# Altium PCB SL1 Xilinx Spartan-IIE PQ208 Rev1.01.PcbDoc
Units mm, origin at the board's own origin, x right, y up, seen from the top; angles counter-clockwise.
Board outline 180.01 x 51.01 mm, 2 copper layers (Top Layer, Bottom Layer); 121 components, 128 nets, 653 pads, 0 vias.
Unrouted connection lines stored in the file: 403.
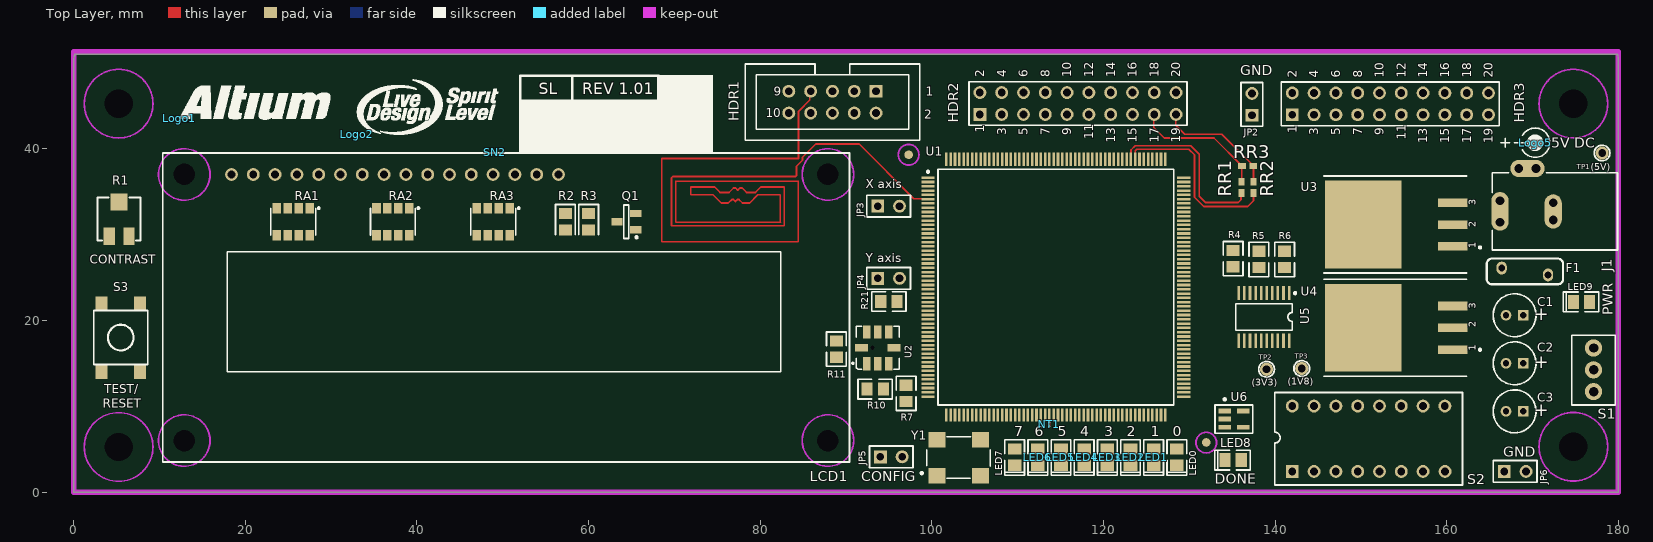
[diagram p0: Top Layer view]
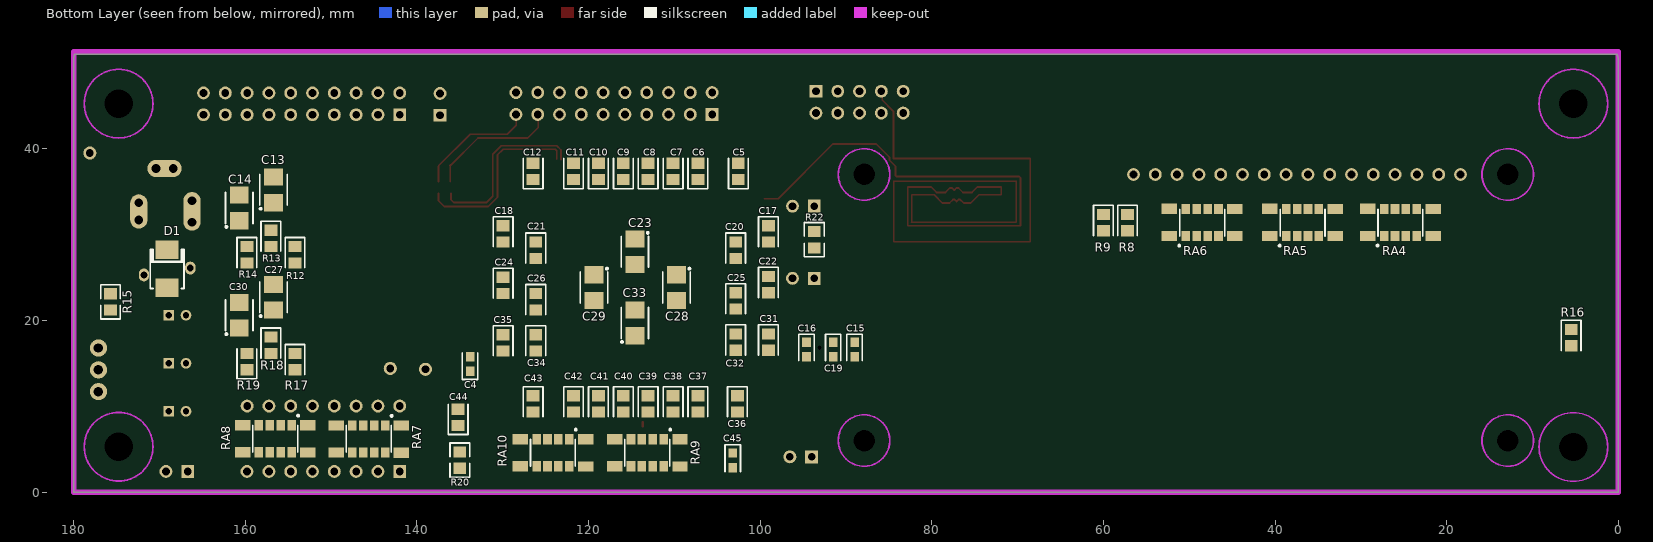
[diagram p1: Bottom Layer view, seen from below]

## Layer stack, top to bottom
Top Layer: signal copper 0.0356
Dielectric: dielectric 0.32, FR-4, Dk 4.8
Bottom Layer: signal copper 0.0356

## Board outline
0,-0.005 cw(c0,0) -0.005,0 -0.005,50.5 cw(c0,50.5) 0,50.505 0.15,51 89.775,51 179.925,51 180,50.505 cw(c180,50.5) 180.005,50.5 180.005,0 cw(c180,0) 180,-0.005

## Design rules (kind name [scope] priority, off if disabled: settings)
Clearance "Clearance_Power Polygon" [inpolygon and innetclass('Power')] p1: gap=0.3
Clearance [All] p2: gap=0.2 // General
ComponentClearance ComponentClearance_D1_F1 [InComponent('D1') vs InComponent('F1')] p1: gap=0.03 collisioncheckmode=3 verticalgap=0.254 showdistances=FALSE
ComponentClearance ComponentClearance_JP4_R21 [InComponent('JP4') vs InComponent('R21')] p2: gap=0.07 collisioncheckmode=3 verticalgap=0.254 showdistances=FALSE
ComponentClearance ComponentClearance_LCD1_U2 [InComponent('LCD1') vs InComponent('U2')] p3: gap=0.09 collisioncheckmode=3 verticalgap=0.254 showdistances=FALSE
ComponentClearance ComponentClearance_U1_U6 [InComponent('U1') vs InComponent('U6')] p4: gap=0.1 collisioncheckmode=3 verticalgap=0.254 showdistances=FALSE
ComponentClearance ComponentClearance_S2 [InComponent('S2') vs InComponent('RA7') Or InComponent('RA8')] p5: gap=0.1 collisioncheckmode=3 verticalgap=0.254 showdistances=FALSE // Why is such a small clearance necessary?
ComponentClearance ComponentClearance_LCD1_R11 [InComponent('LCD1') vs InComponent('R11')] p6: gap=0.16 collisioncheckmode=3 verticalgap=0.254 showdistances=FALSE
ComponentClearance ComponentClearance_J1_Logo5 [InComponent('J1') vs InComponent('Logo5')] p7: gap=0.19 collisioncheckmode=3 verticalgap=0.254 showdistances=FALSE
ComponentClearance ComponentClearance_R2_R3 [InComponent('R2') vs InComponent('R3')] p8: gap=0.19 collisioncheckmode=3 verticalgap=0.254 showdistances=FALSE
ComponentClearance ComponentClearance_R5 [InComponent('R5') vs InComponent('R4') Or InComponent('R6')] p9: gap=0.19 collisioncheckmode=3 verticalgap=0.254 showdistances=FALSE
ComponentClearance ComponentClearance_LEDs [HasFootprint('SMD _LED') vs HasFootprint('SMD _LED')] p10: gap=0.19 collisioncheckmode=3 verticalgap=0.254 showdistances=FALSE
ComponentClearance ComponentClearance_R7_R10 [InComponent('R7') vs InComponent('R10')] p11: gap=0.24 collisioncheckmode=3 verticalgap=0.254 showdistances=FALSE
ComponentClearance ComponentClearance_U1 [InComponent('U1') vs Not InComponent('NT1') && Not InComponent('LED8')] p12: gap=0.254 collisioncheckmode=3 verticalgap=0.254 showdistances=FALSE
ComponentClearance ComponentClearance_General [Not InComponent('U1') vs Not InComponent('U1')] p13: gap=0.254 collisioncheckmode=3 verticalgap=0.254 showdistances=FALSE
ComponentClearance ComponentClearance_Default [All] p14 off: gap=0.254 collisioncheckmode=3 verticalgap=0.254 showdistances=FALSE
DiffPairsRouting [All] p1: maxlimit=0.254 minlimit=0.254 mostfreqgap=0.254 maxuncoupledlength=12.7
FabricationTestPointUsage TestPointUsage [All] p1 off: valid=0 allowmultiple=FALSE
FabricationTestpoint Testpoint [All] p1 off: side=3 testpointundercomponent=TRUE minsize=1.016 maxsize=2.54 preferedsize=1.524 minholesize=0 maxholesize=1.016 preferedholesize=0.813 testpointgrid=0.025 allowsidetop=TRUE allowsidebottom=TRUE usegrid=TRUE gridtolerance=0
HoleSize [All] p1: absolutevalues=TRUE maxlimit=3.302 minlimit=0 maxpercent=80.000 minpercent=20.000
PlaneConnect [All] p1: planeconnectstyle=Relief reliefexpansion=0.3 reliefentries=4 reliefconductorwidth=0.2 reliefairgap=0.2
PolygonConnect PolygonConnect_Power [innetclass('Power')] p1: connectstyle=Relief reliefconductorwidth=0.3 reliefentries=4 polygonreliefangle="90 Angle"
PolygonConnect [All] p2: connectstyle=Relief reliefconductorwidth=0.2 reliefentries=4 polygonreliefangle="90 Angle"
RoutingVias RoutingVias_Power [innetclass('Power')] p1: holewidth=0.6 width=0.9 viastyle="Through Hole" minholewidth=0.6 minwidth=0.9 maxholewidth=0.8 maxwidth=1.5
RoutingVias [All] p2: holewidth=0.6 width=0.9 viastyle="Through Hole" minholewidth=0.6 minwidth=0.9 maxholewidth=0.6 maxwidth=0.9
SignalStimulus SignalStimulus_P [InNet('DRV_P')] p1: kind=1 level=0 starttime=10.00n stoptime=60.00n periodtime=100.00n
SignalStimulus SignalStimulus_N [InNet('DRV_N')] p2: kind=1 level=1 starttime=10.00n stoptime=60.00n periodtime=100.00n
SilkscreenOverComponentPads [All] p1: minsilkscreentomaskgap=0.254
SolderMaskExpansion SolderMaskExpansion_Power_Vias [isvia] p1: expansion=0
SolderMaskExpansion [All] p2: expansion=0.1
SupplyNets SupplyNets_VCCO [InNet('VCCO')] p1: voltage=3.300
SupplyNets SupplyNets_GND [InNet('GND')] p2: voltage=0.000
SupplyNets SupplyNets_5V [InNet('5V')] p3: voltage=5.000
SupplyNets SupplyNets_VCCINT [InNet('VCCINT')] p4: voltage=1.800
Width Width_Power [innetclass('Power') and not inpolygon] p1: maxlimit=2 minlimit=0.3 preferedwidth=0.3
Width [All] p2: maxlimit=2 minlimit=0.2 preferedwidth=0.2
21 further rules are at their usual default settings.

## Classes and differential pairs
net class Power: 5V GND VCCINT VCCO
net class LCD_DB[7..0]: LCD_DB0 LCD_DB1 LCD_DB2 LCD_DB3 LCD_DB4 LCD_DB5 LCD_DB6 LCD_DB7
net class LEDS[7..0]: LEDS0 LEDS1 LEDS2 LEDS3 LEDS4 LEDS5 LEDS6 LEDS7
net class SW[7..0]: SW0 SW1 SW2 SW3 SW4 SW5 SW6 SW7
component class SL_FPGA_Manual_2E: C1 C2 C3 C5 C6 C7 C8 C9 C10 C11 C12 C13 C14 C17 C18 C20 C21 C22 C23 C24 C25 C26 C27 C28 C29 C30 C31 C32 C33 C34 C35 C36 C37 C38 C39 C40 C41 C42 C43 D1 F1 J1 JP2 JP6 LED9 R12 R13 R14 R15 R17 R18 R19 S1 TP1 TP2 TP3 U3 U4
component class U_SL_Config: C4 C44 LED8 R4 R5 R6 R20 U5 U6
component class U_SL_FPGA_Auto_2E: U1
component class U_SL_LCD_SW_LED: LCD1 LED0 LED1 LED2 LED3 LED4 LED5 LED6 LED7 Q1 R1 R2 R3 R8 R9 R16 RA1 RA2 RA3 RA4 RA5 RA6 RA7 RA8 RA9 RA10 S2 S3
differential pair DRV: +DRV_P -DRV_N
differential pair REC: +REC_P -REC_N

## Components (designator, comment, footprint, x,y, rotation, side; value= is the part's Value field where it differs from the comment)
C1 "100uF 16V" CAPPR2-5X6.8 167.9,20.6 r180 top
C2 "100uF 16V" CAPPR2-5X6.8 167.9,15 r180 top
C3 "100uF 16V" CAPPR2-5X6.8 167.9,9.4 r180 top
C4 "10nF" CC1608-0603 133.8,14.9 r90 bottom
C5 "0.1uF" CC2012-0805 102.55,37.35 r90 bottom
C6 "0.1uF" CC2012-0805 107.25,37.35 r90 bottom
C7 "0.1uF" CC2012-0805 110.15,37.35 r90 bottom
C8 "0.1uF" CC2012-0805 113.05,37.35 r90 bottom
C9 "0.1uF" CC2012-0805 115.95,37.35 r90 bottom
C10 "0.1uF" CC2012-0805 118.85,37.35 r90 bottom
C11 "0.1uF" CC2012-0805 121.75,37.35 r90 bottom
C12 "0.1uF" CC2012-0805 126.45,37.35 r90 bottom
C13 "10uF" MCCT-B 156.7,35.2 r90 bottom
C14 "10uF" MCCT-B 160.7,33.1 r90 bottom
C15 "100nF" CC1608-0603 89,16.6 r270 bottom
C16 "100nF" CC1608-0603 94.6,16.6 r270 bottom
C17 "0.1uF" CC2012-0805 99.05,30.075 r270 bottom
C18 "0.1uF" CC2012-0805 129.95,30.075 r270 bottom
C19 "100nF" CC1608-0603 91.5,16.6 r270 bottom
C20 "0.1uF" CC2012-0805 102.85,28.175 r270 bottom
C21 "0.1uF" CC2012-0805 126.15,28.175 r270 bottom
C22 "0.1uF" CC2012-0805 99.05,24.175 r270 bottom
C23 "10uF" MCCT-B 114.6,28 r270 bottom
C24 "0.1uF" CC2012-0805 129.95,24.075 r270 bottom
C25 "0.1uF" CC2012-0805 102.85,22.275 r270 bottom
C26 "0.1uF" CC2012-0805 126.15,22.175 r270 bottom
C27 "10uF" MCCT-B 156.7,22.7 r90 bottom
C28 "10uF" MCCT-B 109.75,23.825 r270 bottom
C29 "10uF" MCCT-B 119.35,23.825 r270 bottom
C30 "10uF" MCCT-B 160.7,20.6 r90 bottom
C31 "0.1uF" CC2012-0805 99.05,17.475 r270 bottom
C32 "0.1uF" CC2012-0805 102.85,17.475 r270 bottom
C33 "10uF" MCCT-B 114.6,19.7 r90 bottom
C34 "0.1uF" CC2012-0805 126.15,17.375 r270 bottom
C35 "0.1uF" CC2012-0805 129.95,17.375 r270 bottom
C36 "0.1uF" CC2012-0805 102.65,10.275 r270 bottom
C37 "0.1uF" CC2012-0805 107.25,10.275 r270 bottom
C38 "0.1uF" CC2012-0805 110.15,10.275 r270 bottom
C39 "0.1uF" CC2012-0805 113.05,10.275 r270 bottom
C40 "0.1uF" CC2012-0805 115.95,10.275 r270 bottom
C41 "0.1uF" CC2012-0805 118.85,10.275 r270 bottom
C42 "0.1uF" CC2012-0805 121.75,10.275 r270 bottom
C43 "0.1uF" CC2012-0805 126.45,10.275 r270 bottom
C44 "0.1uF" CC2012-0805 135.2,8.7 r90 bottom
C45 "10nF" CC1608-0603 103.2,3.7 r270 bottom
D1 "SM6T6V8A" DO214 169.1,26 r90 bottom
F1 "Polyswitch, 1.1A" RUE160_0.2 166.4,26.1 r0 top
HDR1 "Header 5X2" HDR2X5_LP 93.5,46.7 r0 top
HDR2 "Header 10X2" HDR2X10 105.6,44 r0 top locked
HDR3 "Header 10X2" HDR2X10 142,43.96 r0 top locked
J1 "KLD-0202-B" KLD-0202 179.9,32.7 r180 top
JP2 "GND" HDR1X2 137.3,43.9 r90 top locked
JP3 "X axis" HDR1X2 93.693,33.31 r0 top
JP4 "Y axis" HDR1X2 93.7,24.9 r0 top
JP5 "CONFIG" HDR1X2 94,4.1 r0 top
JP6 "GND" HDR1X2 166.7,2.4 r0 top
LCD1 "162A" 162A 18.4,37 r0 top locked
LED0 "HSMH-C170" "SMD _LED" 128.55,4.075 r90 top
LED1 "HSMH-C170" "SMD _LED" 125.85,4.075 r90 top
LED2 "HSMH-C170" "SMD _LED" 123.15,4.075 r90 top
LED3 "HSMH-C170" "SMD _LED" 120.45,4.075 r90 top
LED4 "HSMH-C170" "SMD _LED" 117.75,4.075 r90 top
LED5 "HSMH-C170" "SMD _LED" 115.05,4.075 r90 top
LED6 "HSMH-C170" "SMD _LED" 112.35,4.075 r90 top
LED7 "HSMH-C170" "SMD _LED" 109.65,4.075 r90 top
LED8 "HSMH-C170" "SMD _LED" 135.1,3.725 r0 top
LED9 "HSMH-C170" "SMD _LED" 175.7,22.15 r0 top
Logo1 "Altium logo" Altium 12.325,43.525 r0 top
Logo2 "Live Design - Spirit Level" "Live Design - Spirit Level" 33,41.7 r0 top
Logo5 "5V" "5V Symbol" 170.3,40.7 r0 top
NT1 "*" NT 113.7,8.15 r270 top net-tie
Q1 "2N7002" SO-G3 64.4,31.5 r90 top
R1 "20K" POT4MM-2 5.3,31.8 r90 top
R2 "560R" CC2012-0805 57.3,31.5 r270 top
R3 "10K" CC2012-0805 60,31.5 r270 top
R4 "4K7" CR2012-0805 135.1,27.2 r270 top
R5 "4K7" CR2012-0805 138.1,27.1 r270 top
R6 "4K7" CR2012-0805 141.1,27.1 r270 top
R7 "1K" CR2012-0805 97,11.5 r270 top
R8 "68R" CC2012-0805 57.2,31.4 r270 bottom
R9 "68R" CC2012-0805 60,31.4 r270 bottom
R10 "680R" CR2012-0805 93.4,12 r180 top
R11 "0R" CR2012-0805 88.88,16.65 r90 top
R12 "100R" CC2012-0805 154.2,27.65 r270 bottom
R13 "120R" CC2012-0805 157,29.55 r270 bottom
R14 "100R" CC2012-0805 159.8,27.65 r270 bottom
R15 "270R" CR2012-0805 175.7,22.15 r270 bottom
R16 "4K7" CC2012-0805 5.5,18 r270 bottom
R17 "47R" CC2012-0805 154.2,15.2 r270 bottom
R18 "120R" CC2012-0805 157,17.1 r270 bottom
R19 "5R6" CC2012-0805 159.8,15.2 r90 bottom
R20 "270R" CR2012-0805 135,3.725 r270 bottom
R21 "100R" CR2012-0805 95,22.2 r0 top
R22 "100R" CR2012-0805 93.7,29.4 r270 bottom
RA1 "270R" MNR34 25.6,31.5 r270 top
RA2 "270R" MNR34 37.2,31.5 r270 top
RA3 "270R" MNR34 48.9,31.5 r270 top
RA4 "4K7" MNR34T 25.4,31.4 r270 bottom
RA5 "4K7" MNR34T 36.8,31.4 r270 bottom
RA6 "4K7" MNR34T 48.5,31.4 r270 bottom
RA7 "4K7" MNR34T 145.605,6.175 r90 bottom
RA8 "4K7" MNR34T 156.5,6.2 r90 bottom
RA9 "270R" MNR34T 113.15,4.575 r90 bottom
RA10 "270R" MNR34T 124.15,4.575 r90 bottom
RR1 "Comment" 1005[0402] 136.1,35.5 r90 top
RR2 "Comment" 1005[0402] 137.5,35.5 r270 top
RR3 "Comment" 1005[0402] 136.8,38 r180 top
S1 "TL36WW050" PCB_SWITCH 177.1,11.7 r90 top
S2 "A6ER-8104" DIP-16-KEY 142,2.4 r0 top
S3 "DTSM-61-NR" B3FS_SWITCH 5.5,18 r270 top
SN2 "Serial Number" "SERIAL NUMBER - SMALL" 49.1,39.6 r0 top
TP1 "(5V)" TP 178.1,39.5 r0 top
TP2 "(3V3)" TP 139,14.3 r0 top
TP3 "(1V8)" TP 143.1,14.4 r0 top
U1 "XC2S300E-6PQ208C" PQ208 114.45,23.875 r0 top locked
U2 "ADXL202E" E-8 93.7,16.8 r90 top
U3 "LM1084IS-ADJ" TO-263 160.7,28.62 r90 top
U4 "LM1084IS-ADJ" TO-263 160.7,16.6 r90 top
U5 "XCF02SVO20C" VO20 138.7,20.4 r180 top
U6 "SN74LVC1G04DBV" SO-G5/P.95 135.2,8.5 r270 top
Y1 "25MHz" QSMO_4200 100.6,1.5 r0 top

## Footprints (in the part's own frame and the unit in brackets; to place one, negate y for a bottom-side part, rotate by r counter-clockwise, add the part's x,y. Pads: shape width x height; smd on the part's side, far side on the other; paste and mask are expansions set on the pad)
"5V Symbol" [mm]
  silkscreen extent -4,-1.71 1.71,1.71
162A [mm]
  round 1.5 hole 0.9: 1(0,0) 2(2.54,0) 3(5.08,0) 4(7.62,0) 5(10.16,0) 6(12.7,0) 7(15.24,0) 8(17.78,0) 9(20.32,0) 10(22.86,0) 11(25.4,0) 12(27.94,0) 13(30.48,0) 14(33.02,0) 15(35.56,0) 16(38.1,0)
  round 2.3 hole 2.5 unplated: M1(-5.5,0) M2(69.5,0) M3(-5.5,-31) M4(69.5,-31)
  Keep-Out Layer circle w0.2: c-5.5,0 r3
  Keep-Out Layer circle w0.2: c-5.5,-31 r3
  Keep-Out Layer circle w0.2: c69.5,-31 r3
  Keep-Out Layer circle w0.2: c69.5,0 r3
  silkscreen extent -8,-33.5 72,2.5
1005[0402] [mm] "Resistor; 2 Leads"
  rect 0.9x0.7 smd: 1(-0.65,0) 2(0.65,0)
Altium [mm] "Altium Logo"
  silkscreen extent 0,-0.08 17.6,3.84
B3FS_SWITCH [mm]
  rect 1.6x1.4 smd: 1(4.01,-2.25) 2(-4,-2.25) 3(4.01,2.24) 4(-4,2.24)
  silkscreen extent -3.16,-3.16 3.15,3.15
CAPPR2-5X6.8 [mm]
  rect 1.25x1.25 hole 0.75: 1(-1,0)
  round 1.25 hole 0.75: 2(1,0)
  silkscreen extent -2.5,-2.5 2.5,2.5
CC1608-0603 [mm]
  rect 1.1x1 smd: 1(-0.85,0) 2(0.85,0)
  silkscreen extent -1.8,-0.9 1.3,0.9
CC2012-0805 [mm]
  rect 1.3x1.5 smd: 1(-0.95,0) 2(0.95,0)
  silkscreen extent -2,-1.15 1.5,1.15
CR2012-0805 [mm]
  rect 1.3x1.5 smd: 1(-0.95,0) 2(0.95,0)
  silkscreen extent -2,-1.15 2,1.15
DIP-16-KEY [mm]
  rect 1.5x1.5 hole 0.9: 1(0,0)
  round 1.5 hole 0.9: 2(2.54,0) 3(5.08,0) 4(7.62,0) 5(10.16,0) 6(12.7,0) 7(15.24,0) 8(17.8,0) 9(17.78,7.62) 10(15.24,7.62) 11(12.7,7.62) 12(10.16,7.62) 13(7.62,7.62) 14(5.08,7.62) 15(2.54,7.62) 16(0,7.62)
  silkscreen extent -2.05,-1.59 19.83,9.2
DO214 [mil]
  rect 85x106.3 smd: 1(-87.5,0) 2(87.5,0)
  silkscreen extent -90,-78 90,78
E-8 [mil] "8 terminal Ceramic Leadless Chip Carrier"
  round 15 hole 20 unplated: 0(0,24)
  rect 60x35 smd: 1(-72.84,50) 2(-72.83,0) 3(-72.83,-50) 5(72.83,-50) 6(72.83,0) 7(72.83,50)
  rect 35x60 smd: 4(0,-74.8) 8(0,74.8)
  silkscreen extent -98,-98 99,118
HDR1X2 [mm]
  rect 1.5x1.5 hole 0.9: 1(0,0)
  round 1.5 hole 0.9: 2(2.54,0)
  silkscreen extent -1.27,-1.27 3.81,1.27
HDR2X5_LP [mm]
  rect 1.5x1.5 hole 0.9: 1(0,0)
  round 1.5 hole 0.9: 2(0,-2.54) 3(-2.54,0) 4(-2.54,-2.54) 5(-5.08,0) 6(-5.08,-2.54) 7(-7.62,0) 8(-7.62,-2.54) 9(-10.16,0) 10(-10.16,-2.54)
  silkscreen extent -15.24,-5.71 5.08,3.17
HDR2X10 [mm]
  rect 1.5x1.5 hole 0.9: 1(0,0)
  round 1.5 hole 0.9: 2(0,2.54) 3(2.54,0) 4(2.54,2.54) 5(5.08,0) 6(5.08,2.54) 7(7.62,0) 8(7.62,2.54) 9(10.16,0) 10(10.16,2.54) 11(12.7,0) 12(12.7,2.54) 13(15.24,0) 14(15.24,2.54) 15(17.78,0) 16(17.78,2.54) 17(20.32,0) 18(20.32,2.54) 19(22.86,0) 20(22.86,2.54)
  silkscreen extent -1.27,-1.27 24.13,3.81
KLD-0202 [mm] "DC Power Jack, 2.5mm, KLD Series, PCB Mount"
  oval 2x4.5 all layers, no hole: 1(13.7,0)
  round 1.5 hole 1: 1A(13.7,-1.25) 1B(13.7,1.25) 2A(7.5,-1) 2B(7.5,1) 3A(9.5,-5) 3B(11.5,-5)
  oval 2x4 all layers, no hole: 2(7.5,0)
  oval 4x2 all layers, no hole: 3(10.5,-5)
  silkscreen extent 0,-4.5 14.6,4.5
"Live Design - Spirit Level" [mm]
  silkscreen extent 0,0 16.48,6.38
MCCT-B [mm]
  rect 2x2.2 smd: 1(-1.5,0) 2(1.5,0)
  silkscreen extent -2.3,-1.6 1.8,1.6
MNR34 [mm]
  rect 1.2x1 smd: 1(-1.575,1.905) 2(-1.575,0.635) 3(-1.575,-0.635) 4(-1.575,-1.905) 5(1.575,-1.905) 6(1.575,-0.635) 7(1.575,0.635) 8(1.575,1.905)
  silkscreen extent -1.67,-2.62 1.55,3.07
MNR34T [mm] "Thieved"
  rect 1.2x1 smd: 1(1.575,-1.905) 2(1.575,-0.635) 3(1.575,0.635) 4(1.575,1.905) 5(-1.575,1.905) 6(-1.575,0.635) 7(-1.575,-0.635) 8(-1.575,-1.905)
  rect 1.2x1.8 smd: STP(-1.6,-3.81) STP(-1.575,3.81) STP(1.575,-3.81) STP(1.575,3.81)
  silkscreen extent -1.55,-2.77 2.79,2.62
NT [mm] "Net Tie"
  rect 0.2x0.2 smd mask+0: 1(0,0) 2(0.5,0)
  Top Layer lines w0.3: 0.5,0 0,0
PCB_SWITCH [mm]
  round 2 hole 1.1: 1(0,0) 2(2.54,0) 3(5.08,0)
  silkscreen extent -1.55,-2.54 6.58,2.54
POT4MM-2 [mm]
  rect 2x1.3 smd: CCW(-2,-1.15) CW(-2,1.15)
  rect 2x2 smd: W(2,0)
  silkscreen extent -2.5,-2.5 2.5,2.5
PQ208 [mm] "208-Pin Plastic Quad Flat Pack (PQ208)"
  rect 1.55x0.3 smd: 1(-14.9,12.75) 2(-14.9,12.25) 3(-14.9,11.75) 4(-14.9,11.25) 5(-14.9,10.75) 6(-14.9,10.25) 7(-14.9,9.75) 8(-14.9,9.25) 9(-14.9,8.75) 10(-14.9,8.25) 11(-14.9,7.75) 12(-14.9,7.25) 13(-14.9,6.75) 14(-14.9,6.25) 15(-14.9,5.75) 16(-14.9,5.25) 17(-14.9,4.75) 18(-14.9,4.25) 19(-14.9,3.75) 20(-14.9,3.25) 21(-14.9,2.75) 22(-14.9,2.25) 23(-14.9,1.75) 24(-14.9,1.25) 25(-14.9,0.75) 26(-14.9,0.25) 27(-14.9,-0.25) 28(-14.9,-0.75) 29(-14.9,-1.25) 30(-14.9,-1.75) 31(-14.9,-2.25) 32(-14.9,-2.75) 33(-14.9,-3.25) 34(-14.9,-3.75) 35(-14.9,-4.25) 36(-14.9,-4.75) 37(-14.9,-5.25) 38(-14.9,-5.75) 39(-14.9,-6.25) 40(-14.9,-6.75) 41(-14.9,-7.25) 42(-14.9,-7.75) 43(-14.9,-8.25) 44(-14.9,-8.75) 45(-14.9,-9.25) 46(-14.9,-9.75) 47(-14.9,-10.25) 48(-14.9,-10.75) 49(-14.9,-11.25) 50(-14.9,-11.75) 51(-14.9,-12.25) 52(-14.9,-12.75) 105(14.9,-12.75) 106(14.9,-12.25) 107(14.9,-11.75) 108(14.9,-11.25) 109(14.9,-10.75) 110(14.9,-10.25) 111(14.9,-9.75) 112(14.9,-9.25) 113(14.9,-8.75) 114(14.9,-8.25) 115(14.9,-7.75) 116(14.9,-7.25) 117(14.9,-6.75) 118(14.9,-6.25) 119(14.9,-5.75) 120(14.9,-5.25) 121(14.9,-4.75) 122(14.9,-4.25) 123(14.9,-3.75) 124(14.9,-3.25) 125(14.9,-2.75) 126(14.9,-2.25) 127(14.9,-1.75) 128(14.9,-1.25) 129(14.9,-0.75) 130(14.9,-0.25) 131(14.9,0.25) 132(14.9,0.75) 133(14.9,1.25) 134(14.9,1.75) 135(14.9,2.25) 136(14.9,2.75) 137(14.9,3.25) 138(14.9,3.75) 139(14.9,4.25) 140(14.9,4.75) 141(14.9,5.25) 142(14.9,5.75) 143(14.9,6.25) 144(14.9,6.75) 145(14.9,7.25) 146(14.9,7.75) 147(14.9,8.25) 148(14.9,8.75) 149(14.9,9.25) 150(14.9,9.75) 151(14.9,10.25) 152(14.9,10.75) 153(14.9,11.25) 154(14.9,11.75) 155(14.9,12.25) 156(14.9,12.75)
  rect 0.3x1.55 smd: 53(-12.75,-14.9) 54(-12.25,-14.9) 55(-11.75,-14.9) 56(-11.25,-14.9) 57(-10.75,-14.9) 58(-10.25,-14.9) 59(-9.75,-14.9) 60(-9.25,-14.9) 61(-8.75,-14.9) 62(-8.25,-14.9) 63(-7.75,-14.9) 64(-7.25,-14.9) 65(-6.75,-14.9) 66(-6.25,-14.9) 67(-5.75,-14.9) 68(-5.25,-14.9) 69(-4.75,-14.9) 70(-4.25,-14.9) 71(-3.75,-14.9) 72(-3.25,-14.9) 73(-2.75,-14.9) 74(-2.25,-14.9) 75(-1.75,-14.9) 76(-1.25,-14.9) 77(-0.75,-14.9) 78(-0.25,-14.9) 79(0.25,-14.9) 80(0.75,-14.9) 81(1.25,-14.9) 82(1.75,-14.9) 83(2.25,-14.9) 84(2.75,-14.9) 85(3.25,-14.9) 86(3.75,-14.9) 87(4.25,-14.9) 88(4.75,-14.9) 89(5.25,-14.9) 90(5.75,-14.9) 91(6.25,-14.9) 92(6.75,-14.9) 93(7.25,-14.9) 94(7.75,-14.9) 95(8.25,-14.9) 96(8.75,-14.9) 97(9.25,-14.9) 98(9.75,-14.9) 99(10.25,-14.9) 100(10.75,-14.9) 101(11.25,-14.9) 102(11.75,-14.9) 103(12.25,-14.9) 104(12.75,-14.9) 157(12.75,14.9) 158(12.25,14.9) 159(11.75,14.9) 160(11.25,14.9) 161(10.75,14.9) 162(10.25,14.9) 163(9.75,14.9) 164(9.25,14.9) 165(8.75,14.9) 166(8.25,14.9) 167(7.75,14.9) 168(7.25,14.9) 169(6.75,14.9) 170(6.25,14.9) 171(5.75,14.9) 172(5.25,14.9) 173(4.75,14.9) 174(4.25,14.9) 175(3.75,14.9) 176(3.25,14.9) 177(2.75,14.9) 178(2.25,14.9) 179(1.75,14.9) 180(1.25,14.9) 181(0.75,14.9) 182(0.25,14.9) 183(-0.25,14.9) 184(-0.75,14.9) 185(-1.25,14.9) 186(-1.75,14.9) 187(-2.25,14.9) 188(-2.75,14.9) 189(-3.25,14.9) 190(-3.75,14.9) 191(-4.25,14.9) 192(-4.75,14.9) 193(-5.25,14.9) 194(-5.75,14.9) 195(-6.25,14.9) 196(-6.75,14.9) 197(-7.25,14.9) 198(-7.75,14.9) 199(-8.25,14.9) 200(-8.75,14.9) 201(-9.25,14.9) 202(-9.75,14.9) 203(-10.25,14.9) 204(-10.75,14.9) 205(-11.25,14.9) 206(-11.75,14.9) 207(-12.25,14.9) 208(-12.75,14.9)
  round 1 smd mask+0.7: FID1(-17.15,15.425) FID2(17.525,-18.1)
  Top Layer keep-out circle w0.2: c-17.15,15.425 r1.2
  Top Layer keep-out circle w0.2: c17.525,-18.125 r1.2
  silkscreen extent -15.02,-13.72 13.73,13.73
QSMO_4200 [mm]
  rect 2x1.8 smd: 1(0,0.4) 2(5.08,0.4) 3(5.08,4.6) 4(0,4.6)
  silkscreen extent -1.9,0.1 6.22,4.95
RUE160_0.2 [mm]
  oval 1.2x1.5 hole 0.8: 1(0,0) 2(5.4,-0.8)
  silkscreen extent -1.75,-1.9 7.15,1.1
"SERIAL NUMBER - SMALL" [mm]
  silkscreen extent 2.81,0 25.4,9.02
"SMD _LED" [mm]
  rect 1.3x1.6 smd: 1(0.95,0) 2(-0.95,0)
  silkscreen extent -2.13,-1.15 2,1.15
SO-G3 [mm]
  rect 0.85x1.3 smd: 1(-0.95,-1.1) 2(0.95,-1.1) 3(0,1.1)
  silkscreen extent -1.95,-1.32 1.95,0.3
SO-G5/P.95 [mm]
  rect 0.55x1.45 smd: 1(-0.95,-1.075) 2(0,-1.075) 3(0.95,-1.075) 4(0.95,1.075) 5(-0.95,1.075)
  silkscreen extent -2.42,-2.2 1.65,2.2
TO-263 [mm]
  rect 1x3.4 smd: 1(0,0) 2(2.54,0) 3(5.08,0)
  rect 10.25x8.9 smd: 4(2.54,10.45)
  silkscreen extent -3.1,-3.3 8.2,15
TP [mil] "Testpoint"
  round 60 hole 35.43: 1(0,0)
  silkscreen extent -36,-36 36,36
VO20 [mm]
  rect 0.3x1.65 smd: 1(-2.925,-2.775) 2(-2.275,-2.775) 3(-1.625,-2.775) 4(-0.975,-2.775) 5(-0.325,-2.775) 6(0.325,-2.775) 7(0.975,-2.775) 8(1.625,-2.775) 9(2.275,-2.775) 10(2.925,-2.775) 11(2.925,2.775) 12(2.275,2.775) 13(1.625,2.775) 14(0.975,2.775) 15(0.325,2.775) 16(-0.325,2.775) 17(-0.975,2.775) 18(-1.625,2.775) 19(-2.275,2.775) 20(-2.925,2.775)
  silkscreen extent -3.75,-2.9 3.3,1.55

## Part data
C1 C2 C3 C13 C14 C23 C27 C28 C29 C30 C33: library part CAP_POLAR, "Polar Capacitor"
C4 C5 C6 C7 C8 C9 C10 C11 C12 C15 C16 C17 C18 C19 C20 C21 C22 C24 C25 C26 C31 C32 C34 C35 C36 C37 C38 C39 C40 C41 C42 C43 C44 C45: library part CAP, "Capacitor"
D1: library part BZG03C13, "Zener Diode, 6.2V, 5W"
F1: library part "Fuse 2", "Polyswitch 1.1A, Raychem RUE110"
HDR1: "Header, 5-Pin, Dual row"
HDR2 HDR3: "Header, 10-Pin, Dual row"
J1: "Low Voltage Power Supply Connector"
JP2 JP3 JP4 JP5 JP6 NT1: library part "Jumper, 2-Pin", "Jumper, 2-Pin"
LCD1: "16 char * 2 line LCD character display with b/light"
LED0 LED1 LED2 LED3 LED4 LED5 LED6 LED7 LED8 LED9: library part HSMX-C670, "Typical RED GaAs SMD LED Agilent make"
Q1: "N Channel Mosfet"
R1: library part "RPot SM", "Square Trimming Potentiometer"
R2 R3 R4 R5 R6 R7 R8 R9 R11 R12 R13 R14 R15 R16 R17 R18 R19 R20: library part RES, "Resistor"
R10 R21 R22: library part Res1, "Resistor"
RA1 RA2 RA3 RA4 RA5 RA6 RA7 RA8 RA9 RA10: library part MNR34, "3216x4 Resistor Array"
RR1 RR2 RR3: library part Res3, "Resistor"
S1: library part PCB_MOUNT_SWITCH, "SPDT Subminiature Toggle Switch"
S2: "DIP Switch Side actuator long liver Piano Key"
S3: library part B3FS, "SPNA SMD Keyboard Switch"
TP1 TP2 TP3: library part TestPin
U1: "Spartan-IIE 1.8V FPGA, 208-Pin PQFP, Standard Performance, Commercial Grade"
U2: "Accelerometer with Digital Output"
U3 U4: "5A Low Dropout Possitive Regulators"
U5: "XCF00S Series, Platform Flash In-System Programmable Configuration 3.3V PROM, 20-Pin TSOP, 2-Megabit, Commercial Grade"
U6: library part SN74AHC1G04DBVR
Y1: library part QSMO_4200, "Surface Mount Crystal Oscillator"

## Free pads (board coordinates)
  round 3 hole 3.3 unplated: M3(5.25,5.25) M3(5.25,45.25) M3(174.75,45.25) M3(174.75,5.275)

## Nets (pads, with @x,y where several pads share a name; then routed paths per layer and width w, separated by ;. In a path a pad name is that pad's centre, name@x,y a point inside that pad or via, vN(x,y) a via of type N, cw(c..) or ccw(c..) an arc to the next point about the centre after c; other vN are vias at no path point)
5V: C1.1 C13.1 C27.1 LCD1.2 LCD1.15 R1.CW R15.2 RA4.1 RA4.2 RA4.3 RA4.4 RA5.1 RA5.2 RA5.3 RA5.4 RA6.1 RA6.2 RA6.3 RA6.4 S1.1 S1.2 TP1.1 U3.3 U4.3
CCLK: U1.155 U5.3
CLK_BRD: NT1.2 U1.80 Y1.3
CLK_BRD_1: NT1.1 U1.77
DIN: U1.153 U5.1
DONE: R4.2 U1.104 U5.10 U6.2
DRV_N: RR1.1 U1.165 | length 20.7
  Top Layer w0.2: U1.165@123.2,38.75 U1.165 ; U1.165@123.25,38.75 123.213,38.787 123.2,38.8 123.2,39.85 123.7,40.35 130.175,40.35 131.15,39.375 131.15,34.475 131.9,33.725 135.675,33.725 136.025,34.075 RR1.1@136.025,34.825
DRV_P: RR2.2 U1.164 | length 21.7
  Top Layer w0.2: U1.164@123.7,38.8 123.7,39.784 123.866,39.95 129.95,39.95 130.6,39.3 130.6,34.35 131.675,33.275 136.825,33.275 137.475,33.925 RR2.2@137.475,34.825
GND: C1.2 C2.2 C3.2 C4.2 C5.1 C6.2 C7.2 C8.2 C9.2 C10.2 C11.2 C12.2 C13.2 C14.2 C15.2 C16.2 C17.1 C18.1 C19.2 C20.2 C21.2 C22.1 C23.2 C24.1 C25.2 C26.2 C27.2 C28.2 C29.2 C30.2 C31.2 C32.2 C33.2 C34.1 C35.2 C36.1 C37.2 C38.2 C39.2 C40.2 C41.2 C42.2 C43.2 C44.1 C45.2 D1.1 HDR1.9 HDR1.10 HDR2.20 HDR3.20 J1.2 J1.2A J1.2B J1.3 J1.3A J1.3B JP2.1 JP2.2 JP6.1 JP6.2 LCD1.1 LED9.2 Q1.2 R1.CCW R3.1 R7.1 R10.1 R14.1 R19.2 RA9.1 RA9.2 RA9.3 RA9.4 RA10.1 RA10.2 RA10.3 RA10.4 S2.1 S2.2 S2.3 S2.4 S2.5 S2.6 S2.7 S2.8 S3.3 S3.4 U1.1 U1.12 U1.19 U1.25 U1.32 U1.39 U1.50 U1.51 U1.54 U1.65 U1.72 U1.79 U1.85 U1.92 U1.103 U1.117 U1.124 U1.131 U1.137 U1.144 U1.158 U1.170 U1.177 U1.182 U1.183 U1.185 U1.190 U1.197 U2.3 U5.11 U6.3 Y1.2
HA2: HDR2.2 U1.191
HA3: HDR2.3 JP3.2 U1.189
HA4: HDR2.4 U1.188
HA5: HDR2.5 JP4.2 U1.187
HA6: HDR2.6 U1.181
HA7: HDR2.7 U1.179
HA8: HDR2.8 U1.180
HA9: HDR2.9 U1.176
HA10: HDR2.10 U1.178
HA11: HDR2.11 U1.174
HA12: HDR2.12 U1.175
HA13: HDR2.13 U1.169
HA14: HDR2.14 U1.173
HA15: HDR2.15 U1.167
HA16: HDR2.16 U1.168
HA18: HDR2.18 U1.166
HARD_TCK: HDR1.3 U1.207 U5.6
HARD_TDI: HDR1.1 U1.159
HARD_TDO: HDR1.2 U5.17
HARD_TMS: HDR1.4 U1.2 U5.5
HB2: HDR3.2 U1.163
HB3: HDR3.3 U1.160
HB4: HDR3.4 U1.162
HB5: HDR3.5 U1.138
HB6: HDR3.6 U1.161
HB7: HDR3.7 U1.135
HB8: HDR3.8 U1.136
HB9: HDR3.9 U1.133
HB10: HDR3.10 U1.134
HB11: HDR3.11 U1.129
HB12: HDR3.12 U1.132
HB13: HDR3.13 U1.126
HB14: HDR3.14 U1.127
HB15: HDR3.15 U1.123
HB16: HDR3.16 U1.125
HB17: HDR3.17 U1.121
HB18: HDR3.18 U1.122
HB19: HDR3.19 U1.120
I\N\I\T\: R5.2 U1.107 U5.8
JTAG_NEXUS_TCK: HDR1.7 U1.6 | length 174.4
  Top Layer w0.2: HDR1.7@85.775,46.75 85.775,46.7 85.775,45.675 84.475,44.375 84.475,38.85 68.525,38.85 68.525,29.15 68.55,29.175 84.45,29.175 84.425,29.2 84.425,36.2 84.4,36.225 70.2,36.225 70.175,36.2 70.175,31.45 82.375,31.45 82.35,31.475 82.35,34.65 82.325,34.625 79.719,34.625 78.769,33.675 77.941,33.675 77.541,34.075 77.327,34.075 77.113,33.861 76.898,34.075 76.684,34.075 76.284,33.675 75.456,33.675 74.506,34.625 71.9,34.625 71.925,34.65 71.925,35.5 71.975,35.55 74.681,35.55 75.331,34.9 76.359,34.9 76.884,35.425 77.136,35.425 77.388,35.173 77.639,35.425 77.891,35.425 78.416,34.9 79.444,34.9 80.094,35.55 82.8,35.55 82.8,31.05 82.775,31.025 69.7,31.025 69.675,31.05 69.675,36.6 69.85,36.775 84.15,36.775 84.225,36.85 84.225,37.95 84.93,38.655 84.93,39.005 86.475,40.55 91.525,40.55 97.9,34.175 U1.6@99.525,34.175
JTAG_NEXUS_TDI: HDR1.5 U1.4
JTAG_NEXUS_TDO: HDR1.6 U1.5
JTAG_NEXUS_TMS: HDR1.8 U1.7
LCD_CONTRAST: LCD1.3 R1.W
LCD_DB0: RA2.5 U1.20
LCD_DB1: RA2.6 U1.18
LCD_DB2: RA2.7 U1.17
LCD_DB3: RA2.8 U1.16
LCD_DB4: RA3.5 U1.15
LCD_DB5: RA3.6 U1.11
LCD_DB6: RA3.7 U1.10
LCD_DB7: RA3.8 U1.9
LCD_DB#0: LCD1.7 RA2.4 RA5.5
LCD_DB#1: LCD1.8 RA2.3 RA5.6
LCD_DB#2: LCD1.9 RA2.2 RA5.7
LCD_DB#3: LCD1.10 RA2.1 RA5.8
LCD_DB#4: LCD1.11 RA3.4 RA6.5
LCD_DB#5: LCD1.12 RA3.3 RA6.6
LCD_DB#6: LCD1.13 RA3.2 RA6.7
LCD_DB#7: LCD1.14 RA3.1 RA6.8
LCD_E: RA1.8 U1.21
LCD_E#: LCD1.6 RA1.1 RA4.8
LCD_LIGHT: R2.1 U1.8
LCD_RS: RA1.6 U1.23
LCD_RS#: LCD1.4 RA1.3 RA4.6
LCD_RW: RA1.7 U1.22
LCD_RW#: LCD1.5 RA1.2 RA4.7
LEDS0: LED0.1 U1.102
LEDS1: LED1.1 U1.101
LEDS2: LED2.1 U1.100
LEDS3: LED3.1 U1.99
LEDS4: LED4.1 U1.98
LEDS5: LED5.1 U1.97
LEDS6: LED6.1 U1.96
LEDS7: LED7.1 U1.95
M0: JP5.1 R7.2 U1.52
NetC15_1: C15.1 R11.2 U2.8
NetC16_1: C16.1 U2.6
NetC19_1: C19.1 U2.7
NetD1_2: D1.2 F1.2 S1.3
NetLCD1_16: LCD1.16 R8.1 R9.1
NetLED0_2: LED0.2 RA10.5
NetLED1_2: LED1.2 RA10.6
NetLED2_2: LED2.2 RA10.7
NetLED3_2: LED3.2 RA10.8
NetLED4_2: LED4.2 RA9.5
NetLED5_2: LED5.2 RA9.6
NetLED6_2: LED6.2 RA9.7
NetLED7_2: LED7.2 RA9.8
NetLED8_1: LED8.1 R20.1
NetLED8_2: LED8.2 U6.4
NetLED9_1: LED9.1 R15.1
NetQ1_1: Q1.1 R2.2 R3.2
NetQ1_3: Q1.3 R8.2 R9.2
NetR10_2: R10.2 U2.2
NetR12_1: R12.1 R13.2 U3.1
NetR12_2: R12.2 R14.2
NetR17_1: R17.1 R18.2 U4.1
NetR17_2: R17.2 R19.1
PROG_B: R6.2 U1.106 U5.7
PWR_IN: F1.1 J1.1 J1.1A J1.1B
REC_N: HDR2.17 RR1.2 RR3.2 | length 15.5
  Top Layer w0.2: HDR2.17@125.85,43.925 125.85,42.475 127.075,41.25 132.875,41.25 RR3.2@136.125,38 ; RR1.2@136.125,36.175 RR3.2@136.125,38 ; RR3.2@136.125,38.1 RR3.2@136.125,38.05 ; RR3.2@136.15,38.025 RR3.2@136.125,38.05 ; RR3.2@136.125,38 RR3.2@136.125,38.05
REC_P: HDR2.19 RR2.1 RR3.1 | length 13.8
  Top Layer w0.2: HDR2.19@128.425,43.825 128.425,42.725 129.45,41.7 133.8,41.7 RR3.1@137.425,38.075 ; RR2.1@137.475,36.15 RR3.1@137.475,37.95
SW0: RA7.1 S2.16 U1.108
SW1: RA7.2 S2.15 U1.109
SW2: RA7.3 S2.14 U1.110
SW3: RA7.4 S2.13 U1.111
SW4: RA8.1 S2.12 U1.112
SW5: RA8.2 S2.11 U1.113
SW6: RA8.3 S2.10 U1.114
SW7: RA8.4 S2.9 U1.115
TDI_C: U1.157 U5.4
TEST: R16.2 S3.1 S3.2 U1.27
VCCINT: C3.1 C7.1 C8.1 C10.1 C20.1 C21.1 C25.1 C26.1 C28.1 C29.1 C30.1 C32.1 C34.2 C38.1 C39.1 C41.1 R18.1 TP3.1 U1.14 U1.28 U1.37 U1.67 U1.76 U1.90 U1.119 U1.128 U1.142 U1.172 U1.186 U1.195 U4.2
VCCO: C2.1 C4.1 C5.2 C6.1 C9.1 C11.1 C12.1 C14.1 C17.2 C18.2 C22.2 C23.1 C24.2 C31.1 C33.1 C35.1 C36.2 C37.1 C40.1 C42.1 C43.1 C44.2 C45.1 JP5.2 R4.1 R5.1 R6.1 R11.1 R13.1 R16.1 R20.2 RA7.5 RA7.6 RA7.7 RA7.8 RA8.5 RA8.6 RA8.7 RA8.8 TP2.1 U1.13 U1.26 U1.38 U1.53 U1.66 U1.78 U1.91 U1.105 U1.118 U1.130 U1.143 U1.156 U1.171 U1.184 U1.196 U1.208 U3.2 U5.18 U5.19 U5.20 U6.5 Y1.1 Y1.4
XOUT: R22.2 U2.5
XOUT_ALT: JP3.1 R22.1 U1.30
YOUT: R21.2 U2.4
YOUT_ALT: JP4.1 R21.1 U1.31
pads on no net: HDR2.1 HDR3.1 LCD1.M1 LCD1.M2 LCD1.M3 LCD1.M4 RA1.4 RA1.5 RA4.5 RA4.STP RA5.STP RA6.STP RA7.STP RA8.STP RA9.STP RA10.STP U1.3 U1.24 U1.29 U1.33 U1.34 U1.35 U1.36 U1.40 U1.41 U1.42 U1.43 U1.44 U1.45 U1.46 U1.47 U1.48 U1.49 U1.55 U1.56 U1.57 U1.58 U1.59 U1.60 U1.61 U1.62 U1.63 U1.64 U1.68 U1.69 U1.70 U1.71 U1.73 U1.74 U1.75 U1.81 U1.82 U1.83 U1.84 U1.86 U1.87 U1.88 U1.89 U1.93 U1.94 U1.116 U1.139 U1.140 U1.141 U1.145 U1.146 U1.147 U1.148 U1.149 U1.150 U1.151 U1.152 U1.154 U1.192 U1.193 U1.194 U1.198 U1.199 U1.200 U1.201 U1.202 U1.203 U1.204 U1.205 U1.206 U1.FID1 U1.FID2 U2.0 U2.1 U3.4 U4.4 U5.2 U5.9 U5.12 U5.13 U5.14 U5.15 U5.16 U6.1

## Keep-outs
Keep-Out Layer:
  circle w0.2: c5.25,5.25 r4
  circle w0.2: c174.75,5.275 r4
  circle w0.2: c5.25,45.25 r4
  circle w0.2: c174.75,45.25 r4
  lines w0.635: 0,0 0,51.325 180,51.325 180,0 0,0

## Silkscreen, mask and mechanical layers (free items; w line width, h text height)
Top Overlay:
  text "CONTRAST" at 1.9,26.6 h1
  text "PWR" at 179.324,20.574 h1.2 r90
  text "TEST/" at 3.6,11.5 h1
  text "RESET" at 3.4,9.8 h1
  text "7" at 109.6,6.5 h1.2
  text "6" at 112,6.5 h1.2
  text "5" at 114.7,6.5 h1.2
  text "4" at 117.3,6.5 h1.2
  text "3" at 120.1,6.5 h1.2
  text "2" at 122.7,6.5 h1.2
  text "1" at 125.5,6.5 h1.2
  text "0" at 128.1,6.5 h1.2
  text "DONE" at 132.968,0.946 h1.2
Unit PCB Boundary:
  lines w0.2: 0,50.5 0,0 180,0 180,50.5
  text "PCB boundary coincides with centre-line of tracks" at 0,-10 h0.75
Overlay boundary:
  lines w0.2: 0.508,0.508 179.492,0.508 179.5,50.025
  text "PCB boundary coincides with centre-line of tracks" at 0,-10 h0.75
Gerber ID:
  text ".Layer_Name" at 0,-6 h0.75
Dimensions:
  text "Dimensions in millimetres (mm)" at 0,-8 h0.75
Design Information:
  drawing of 719 lines, arcs and shapes, not listed
  text "Spirit Level Rev 1.01" at 282.247,157.974 h1.27
  text "DESIGN INFORMATION" at 226.24,157.847 h1.52
  text "BOARD NAME:" at 263.832,157.847 h1.52
  text "BOARD TECHNOLOGY" at 226.24,155.307 h1.52
  text "BOARD SIZE (REFER ALSO PROFILING INFORMATION)" at 274.5,155.307 h1.27
  text "50.50mm" at 282.22,153.033 h1.52
  text "15.000" at 242.039,152.945 h1.52
  text "180.00mm" at 305.22,152.933 h1.52
  text "7.874" at 256.009,152.818 h1.52
  text "7.874" at 229.066,152.767 h1.52
  text "(Unit)" at 321.29,152.709 h1.52
  text "X" at 298.169,152.259 h1.78
  text "(MIN. TRACK/   PADS  /CLEARANCE IN 0.001'')" at 224.716,150.227 h1.27
  text "MINIMUM ANNULAR RING 0.05MM (0.002'') EXTERNAL PER IPC-2221 CLASS 3 LEVEL C AND IS THE" at 226.24,147.687 h1.27
  text "MANUFACTURING REGISTRATION ALLOWANCE" at 226.24,145.401 h1.27
  text "LAND SIZE CALCULATION MINIMUM - NOMINAL HOLE SIZE + 0.508MM (0.020'')" at 226.24,142.607 h1.27
  text "AS INSTRUCTED" at 312.27,138.213 h1.52
  text "X" at 263.883,138.086 h1.52
  text "CIRCUIT TYPE:" at 226.24,138.035 h1.52
  text "SS" at 249.1,138.035 h1.27
  text "DS" at 266.88,138.035 h1.27
  text "X" at 281.485,138.035 h1.52
  text "PTH" at 284.66,138.035 h1.27
  text "ML" at 295.582,138.035 h1.27
  text "X" at 299.392,138.035 h1.52
  text "No. OFF" at 302.44,138.035 h1.27
  text "FINGER CONNECTOR DIM PER:" at 226.24,134.987 h1.52
  text "AS SHOWN" at 302.44,134.987 h1.27
  text "No. OFF TOTAL" at 243.004,132.193 h1.52
  text "ONE SIDE" at 284.66,132.193 h1.27
  text "BOTH SIDES" at 302.44,131.939 h1.27
  text "VIAS:" at 226.24,129.272 h1.52
  text "NONE" at 237.67,129.272 h1.14
  text "X" at 246.052,129.272 h1.52
  text "FEED THRU'" at 249.1,129.272 h1.14
  text "X" at 263.832,129.272 h1.52
  text "TENTED" at 266.88,129.272 h1.14
  text "BURIED LAYER SEQUENCE" at 284.66,129.272 h1.14
  text "UNIQUE DRILL" at 249.1,126.224 h1.14
  text "2 SIZE" at 266.88,126.224 h1.14
  text "BLIND LAYER SEQUENCE" at 284.66,126.224 h1.14
  text "Layer Stack Manager (Protel)" at 261.673,123.938 h1.27
  text "X" at 299.392,123.938 h1.52
  text "AS SHOWN" at 302.44,123.938 h1.27
  text "LAYER CONSTRUCTION PER:" at 226.24,123.811 h1.52
  text "Protel" at 307.266,121.271 h1.27
  text "(PFW)" at 317.553,121.144 h1.27
  text "ARTWORK:" at 226.24,121.017 h1.52
  text "MANUAL" at 249.1,121.017 h1.27
  text "DIGITISED" at 266.88,121.017 h1.27
  text "X" at 281.612,121.017 h1.52
  text "CAD" at 284.66,121.017 h1.27
  text "TYPE" at 295.582,121.017 h1.27
  text "ARTWORK/PATTERN MASTER LIST" at 226.24,116.318 h1.52
  text "DESCRIPTION" at 227.51,113.905 h1.27
  text "DRAWING No./CAD FILE REF." at 246.179,113.905 h1.27
  text "LAYER NAME" at 287.454,113.905 h1.27
  text "GERBER FILE REF" at 308.206,113.829 h1.27
  text "PCB FILE" at 225.956,111.441 h1.27
  text "SpiritLevel_2E_Rev1_01" at 246.327,111.365 h1.27
  text "PcbDoc" at 277.569,111.365 h1.02
  text "Top Paste Mask" at 285.748,108.901 h1.02
  text "GTP" at 328.369,108.825 h1.27
  text "GERBER FILE" at 225.956,108.774 h1.27
  text "GTO" at 328.318,106.336 h1.27
  text "Top Overlay" at 285.748,106.31 h1.02
  text "GERBER FILE" at 225.956,106.234 h1.27
  text "Top Solder Mask" at 285.748,103.872 h1.02
  text "GTS" at 328.369,103.745 h1.27
  text "GERBER FILE" at 225.956,103.694 h1.27
  text "TOP LAYER" at 285.748,101.281 h1.02
  text "GTL" at 328.369,101.205 h1.27
  text "GERBER FILE" at 225.956,101.154 h1.27
  text "BOTTOMLAYER" at 285.748,98.801 h1.02
  text "GBL" at 328.369,98.725 h1.27
  text "GERBER FILE" at 225.956,98.614 h1.27
  text "Bottom Solder Mask" at 285.748,96.312 h1.02
  text "GBS" at 328.369,96.185 h1.27
  text "GERBER FILE" at 225.956,96.074 h1.27
  text "Bottom Overlay" at 285.748,93.721 h1.02
  text "GBO" at 328.369,93.645 h1.27
  text "GERBER FILE" at 225.956,93.534 h1.27
  text "Bottom Paste Mask" at 285.748,91.232 h1.02
  text "GBP" at 328.369,91.105 h1.27
  text "GERBER FILE" at 225.956,90.994 h1.27
  text "PCB Boundary" at 285.748,88.641 h1.02
  text "GM1" at 328.369,88.565 h1.27
  text "GERBER FILE" at 225.956,88.454 h1.27
  text "Plated Route Details" at 285.748,86.121 h1.02
  text "GM2" at 328.369,86.045 h1.27
  text "GERBER FILE" at 225.956,85.914 h1.27
  text "APERTURE LIST" at 225.956,83.411 h1.27
  text "APR" at 278.569,83.335 h1.27
  text "DRILL REPORT" at 225.956,80.871 h1.27
  text "DRR" at 278.569,80.795 h1.27
  text "EXCELLON DRILL" at 225.956,78.331 h1.27
  text "TXT" at 278.569,78.255 h1.27
  text "MATERIAL:" at 226.24,55.231 h1.52
  text "GLASS FIBRE EPOXY RESIN NEMA GRADE FR4 (MIL-S-13949H)" at 251.894,54.977 h1.27
  text "X" at 249.227,54.85 h1.52
  text "THICKNESS:" at 234.114,52.056 h1.27
  text "0.8mm" at 251.894,52.056 h1.27
  text "1.2mm" at 269.547,52.056 h1.27
  text "1.6mm" at 287.2,52.056 h1.27
  text "2.4mm" at 304.98,52.056 h1.27
  text "3.2mm" at 322.76,52.056 h1.27
  text "X" at 284.787,51.929 h1.52
  text "TOLERANCE:" at 233.987,49.008 h1.27
  text "IN A/W IPC-D-300G CLASS" at 251.64,49.008 h1.27
  text "3 LEVEL B" at 286.565,49.008 h1.27
  text "OTHER +/-" at 304.98,49.008 h1.27
  text "X" at 249.227,48.881 h1.52
  text "BOW & TWIST:" at 231.574,45.96 h1.27
  text "IN A/W IPC-D-300G CLASS" at 251.64,45.96 h1.27
  text "3 LEVEL B" at 286.565,45.96 h1.27
  text "AS SHOWN" at 305.107,45.833 h1.27
  text "X" at 249.227,45.706 h1.52
  text "COPPER THICKNESS (FINISHED)" at 233.987,42.658 h1.27
  text "OUTER:" at 238.813,40.372 h1.27
  text "18um" at 251.894,40.372 h1.27
  text "35um" at 278.945,40.372 h1.27
  text "70um" at 305.234,40.372 h1.27
  text "X" at 276.202,40.169 h1.52
  text "INNER SIGNAL:" at 230.431,37.324 h1.27
  text "18um" at 251.894,37.324 h1.27
  text "35um" at 278.945,37.324 h1.27
  text "70um" at 305.234,37.324 h1.27
  text "INNER PWR:" at 234.114,34.276 h1.27
  text "18um" at 251.894,34.276 h1.27
  text "35um" at 278.945,34.276 h1.27
  text "70um" at 305.234,34.276 h1.27
  text "STRUCTURE:" at 226.24,31.228 h1.52
  text "REFER" at 251.894,31.228 h1.27
  text "AS PER DRAWING No." at 251.767,28.053 h1.27
  text "AS SHOWN" at 305.107,28.053 h1.27
  text "X" at 302.567,27.926 h1.52
  text "DRILLING:" at 226.24,25.259 h1.52
  text "VIEWED FROM:" at 231.193,22.973 h1.27
  text "COMPONENT SIDE" at 251.894,22.973 h1.14
  text "SOLDER SIDE" at 278.691,22.973 h1.14
  text "X" at 249.227,22.719 h1.52
  text "REFERENCE:" at 233.479,19.925 h1.27
  text "AS SHOWN" at 251.767,19.798 h1.14
  text "PATTERN MASTER LIST" at 278.818,19.798 h1.14
  text "X" at 302.567,19.798 h1.52
  text "NC_DRILL FILES" at 305.107,19.798 h1.14
  text "X" at 249.227,19.671 h1.52
  text "PTH MINIMUM COPPER THICKNESS:" at 239.321,16.877 h1.27
  text "20um" at 278.945,16.877 h1.27
  text "X" at 276.278,16.75 h1.52
  text "OTHER" at 305.107,16.75 h1.27
  text "NPTH:" at 239.829,13.829 h1.27
  text "TENTED" at 251.767,13.702 h1.14
  text "X" at 276.278,13.702 h1.52
  text "PADS REMOVED" at 278.818,13.702 h1.14
  text "REMOVE PADS" at 305.107,13.702 h1.14
  text "X" at 249.227,13.575 h1.52
  text "2nd DRILL" at 251.767,10.654 h1.14
  text "BOTH" at 278.818,10.654 h1.14
  text "AS SHOWN" at 291.137,10.654 h1.14
  text "NONE" at 305.107,10.654 h1.14
  text "BOARD FINISH:" at 226.24,7.733 h1.52
  text "X" at 249.227,7.606 h1.52
  text "ETCHING" at 251.767,7.606 h1.14
  text "REFER PATTERN MASTER LIST" at 278.818,7.606 h1.14
  text "LEGEND / SCREEN PRINT:" at 246.56,4.685 h1.27
  text "NONE" at 278.818,4.558 h1.14
  text "COMPONENT" at 291.137,4.558 h1.14
  text "SOLDER" at 305.107,4.558 h1.14
  text "X" at 288.597,4.431 h1.52
  text "X" at 302.567,4.431 h1.52
  text "COLOUR:" at 236.781,1.637 h1.27
  text "WHITE" at 251.767,1.51 h1.14
  text "YELLOW" at 278.818,1.51 h1.14
  text "OTHER" at 305.107,1.51 h1.14
  text "X" at 249.227,1.383 h1.52
  text "X" at 249.227,-1.538 h1.52
  text "LIQUID PHOTOIMAGEABLE" at 251.767,-1.538 h1.14
  text "SCREEN PRINT" at 291.137,-1.538 h1.14
  text "MATTE" at 251.767,-4.586 h1.14
  text "GLOSS" at 264.467,-4.586 h1.14
  text "GREEN" at 278.818,-4.586 h1.14
  text "BLUE" at 291.137,-4.586 h1.14
  text "G/Y" at 305.107,-4.586 h1.14
  text "OTHER" at 316.537,-4.586 h1.14
  text "X" at 261.8,-4.713 h1.52
  text "SOLDER MASK COLOUR:" at 226.24,-7.507 h1.14
  text "BLACK" at 251.767,-7.634 h1.14
  text "GREEN" at 264.467,-7.634 h1.14
  text "YELLOW" at 278.818,-7.634 h1.14
  text "BLUE" at 291.137,-7.634 h1.14
  text "OTHER" at 305.107,-7.634 h1.14
  text "X" at 249.1,-7.761 h1.52
  text "TRACK FINISH:" at 226.24,-10.555 h1.52
  text "SELECTIVE SOLDER (HASL)" at 251.767,-10.682 h1.14
  text "REFLOW SOLDER" at 291.137,-10.682 h1.14
  text "X" at 249.152,-10.757 h1.52
  text "SELECTIVE GOLD" at 251.767,-13.73 h1.14
  text "um  (AREA" at 278.818,-13.73 h1.14
  text "sq. mm)" at 306.631,-13.73 h1.14
  text "REFER PATTERN MASTER LIST" at 251.767,-16.778 h1.14
  text "OTHER" at 291.137,-16.778 h1.14
  text "EDGE BOARD" at 226.24,-19.699 h1.52
  text "1.3um HARD GOLD OVER 5um     NICKEL / TIN-NICKEL" at 251.767,-19.826 h1.14
  text "CONTACTS:" at 226.24,-21.858 h1.52
  text "HARD FINISH GOLDE PLATE" at 251.767,-22.874 h1.14
  text "OTHER" at 291.137,-22.874 h1.14
  text "AS SHOWN" at 251.767,-25.922 h1.14
  text "REFER" at 291.137,-25.922 h1.14
  text "PROFILING:" at 226.24,-28.97 h1.52
  text "AS DIMENSIONED, MEASURED AND CUT FROM SPECIFIED DATUM." at 251.767,-28.97 h1.14
  text "X" at 249.227,-29.097 h1.52
  text "REFER PCB BLANK DWG No." at 251.894,-31.891 h1.27
  text "USE PROFILE / ROUTE TAPE SUPPLIED (REFER PATTERN MASTER LIST)" at 251.894,-34.939 h1.27
  text "SQUARE CUT" at 251.894,-37.987 h1.27
  text "N.C. ROUTE" at 269.674,-37.987 h1.27
  text "V. SCORE" at 287.454,-37.987 h1.27
  text "BLANK" at 305.234,-37.987 h1.27
  text "ACCEPTABILITY:" at 226.24,-40.654 h1.52
  text "MATERIALS AND WORKMANSHIP FOR ALL PRINTED WIRING BOARDS TO MEET" at 248.465,-40.781 h1.27
  text "OR EXCEED THE REQUIREMENTS OF:" at 248.465,-43.575 h1.27
  text "IPC-6011/12 AND IPC-A-600E" at 252.021,-46.242 h1.27
  text "1" at 287.581,-46.242 h1.27
  text "2" at 296.471,-46.242 h1.27
  text "X" at 293.804,-46.369 h1.52
  text "X" at 249.354,-46.496 h1.52
  text "3" at 305.361,-48.401 h1.27
  text "UL CERTIFICATION" at 252.021,-49.29 h1.27
  text "AUSTEL" at 287.581,-49.29 h1.27
  text "X" at 249.354,-49.417 h1.52
  text "ML-P-55110F GRP" at 251.513,-52.338 h1.02
  text "A" at 269.801,-52.338 h1.27
  text "B" at 278.691,-52.338 h1.27
  text "AS2546" at 287.581,-52.338 h1.27
  text "OTHER" at 305.361,-52.338 h1.27
  text "ADDITIONAL" at 226.24,-55.259 h1.52
  text "NONE" at 252.021,-55.513 h1.27
  text "SAMPLE PLAN" at 269.801,-55.513 h1.27
  text "MIL-P-55110E SERIAL Nos. PER ORDER" at 287.581,-55.513 h1.27
  text "REQUIREMENTS:" at 226.24,-57.672 h1.52
  text "NONE" at 252.021,-58.561 h1.27
  text "ML-P-55110F GRP" at 269.293,-58.561 h1.02
  text "A" at 287.581,-58.561 h1.27
  text "B" at 296.471,-58.561 h1.27
  text "IPC CLASS:" at 302.44,-58.561 h1.27
  text "1" at 317.934,-58.561 h1.27
  text "2" at 324.284,-58.561 h1.27
  text "3" at 330.634,-58.561 h1.27
  text "QUALITY RELEASE REPORT" at 269.801,-61.609 h1.27
  text "OTHER" at 310.314,-61.609 h1.27
  text "PER ORDER" at 318.823,-61.736 h1.27
  text "X" at 307.647,-61.863 h1.52
  text "NONE" at 269.801,-64.657 h1.27
  text "REQUIRED" at 287.581,-64.657 h1.27
  text "PER ORDER" at 310.441,-64.657 h1.27
  text "ELECTRICAL TEST:" at 226.24,-64.784 h1.52
  text "X" at 284.914,-64.784 h1.52
  text "NONE" at 269.801,-67.705 h1.27
  text "1 SIDE" at 287.454,-67.705 h1.14
  text "2 SIDES" at 298.63,-67.705 h1.14
  text "MIN. PITCH" at 310.314,-67.705 h1.27
  text "0.65mm" at 323.903,-67.705 h1.27
  text "SURFACE MOUNT:" at 226.24,-67.832 h1.52
  text "X" at 296.395,-67.908 h1.52
  text "NONE" at 269.801,-70.753 h1.27
  text "FOIL" at 287.581,-70.753 h1.27
  text "LEGEND" at 299.011,-70.753 h1.27
  text "REFER" at 310.314,-70.753 h1.27
  text "MANUFACTURER'S ID/LOGO:" at 226.24,-70.88 h1.52
  text "ISO9001/AS3901" at 273.611,-73.801 h1.27
  text "NONE" at 310.314,-73.801 h1.27
  text "MANUFACTURER'S ACCREDITATION:" at 226.24,-73.928 h1.52
  text "X" at 270.944,-73.928 h1.52
  text "PER ORDER" at 269.801,-76.849 h1.27
  text "REFER" at 287.581,-76.849 h1.27
  text "PACKAGING AND HANDLING:" at 226.24,-76.976 h1.52
  text "X" at 267.134,-77.103 h1.52
WS Board Travel:
  lines w0.2: 84.42,-6.5 84.42,-8.4 86.32,-6.5 87,-6.5 ; 86.4,-8.4 88.3,-6.5 ; 88.4,-8.4 90.3,-6.5 ; 90.4,-8.4 92.3,-6.5 ; 92.4,-8.4 94.3,-6.5 ; 94.4,-8.4 96.655,-6.155
  lines w0.203: 84.42,-8.4 94.7,-8.4 94.7,-10.8 98,-7.5 94.7,-4.2 94.7,-6.5 84.42,-6.5
  text "BOARD TRAVEL" at 81.56,-13.19 h1.5
Sheet Detail:
  drawing of 1882 lines, arcs and shapes, not listed
  text "1" at -27.183,163.091 h1.78
  text "2" at 21.856,163.091 h1.78
  text "3" at 71.115,163.091 h1.78
  text "4" at 120.408,163.091 h1.78
  text "5" at 169.684,163.091 h1.78
  text "6" at 218.706,163.091 h1.78
  text "7" at 268.236,163.091 h1.78
  text "8" at 317.258,163.091 h1.78
  text "A" at -49.315,129.106 h1.78
  text "A" at 339.305,129.106 h1.78
  text "B" at -49.315,58.494 h1.78
  text "B" at 339.305,58.494 h1.78
  text "C" at -49.315,-12.118 h1.78
  text "C" at 339.305,-12.118 h1.78
  text "D" at -49.315,-82.222 h1.78
  text "D" at 339.305,-82.222 h1.78
  text "ENGINEER:" at 224.37,-82.4 h1.14
  text "TITLE:" at 262.47,-82.4 h1.14
  text "PCB DESIGNER:" at 224.37,-89.893 h1.14
  text "DATE:" at 224.37,-97.64 h1.14
  text "PART NO.:" at 262.47,-97.64 h1.14
  text "REV:" at 315.81,-97.64 h1.14
  text "Altium Limited" at 191.35,-100.18 h1.78
  text ".PRINT_DATE" at 225.64,-100.688 h1.78
  text "12a Rodborough Rd" at 191.35,-102.72 h1.78
  text "Frenchs Forest" at 191.35,-105.26 h1.78
  text "FILE NAME:" at 224.37,-105.26 h1.14
  text "DWG NO:" at 262.47,-105.26 h1.14
  text "SCALE:" at 315.81,-105.26 h1.14
  text "NSW 2086" at 191.35,-107.8 h1.78
  text ".PCB_FILE_NAME_NO_PATH" at 225.64,-108.308 h1.78
  text "1" at -27.183,-113.769 h1.78
  text "2" at 21.856,-113.769 h1.78
  text "3" at 71.115,-113.769 h1.78
  text "4" at 120.408,-113.769 h1.78
  text "5" at 169.684,-113.769 h1.78
  text "6" at 218.706,-113.769 h1.78
  text "7" at 268.236,-113.769 h1.78
  text "8" at 317.258,-113.769 h1.78

## Dimensions
0,-0.005 to 180,-0.005 on Dimensions
0,0 to -0.005,50.5 on Dimensions

## Text inside footprints (layer, text, board x,y; h text height)
C1: Top Overlay "+" at 171.875,21.35 h1.5 r180
C2: Top Overlay "+" at 171.875,15.75 h1.5 r180
C3: Top Overlay "+" at 171.875,10.15 h1.5 r180
HDR1: Top Overlay "2" at 99.1,43.5 h1; Top Overlay "1" at 99.3,46.2 h1; Top Overlay "9" at 81.562,46.192 h1; Top Overlay "10" at 80.673,43.652 h1
HDR2: Top Overlay "18" at 126.428,48.318 h1 r90; Top Overlay "17" at 126.428,40.698 h1 r90; Top Overlay "14" at 121.348,48.318 h1 r90; Top Overlay "13" at 121.348,40.698 h1 r90; Top Overlay "10" at 116.268,48.318 h1 r90; Top Overlay "9" at 116.268,41.587 h1 r90; Top Overlay "8" at 113.728,48.318 h1 r90; Top Overlay "7" at 113.728,41.587 h1 r90; Top Overlay "4" at 108.648,48.318 h1 r90; Top Overlay "3" at 108.648,41.587 h1 r90; Top Overlay "5" at 111.188,41.587 h1 r90; Top Overlay "11" at 118.808,41.079 h1 r90; Top Overlay "15" at 123.888,40.698 h1 r90; Top Overlay "6" at 111.188,48.318 h1 r90; Top Overlay "12" at 118.808,48.318 h1 r90; Top Overlay "16" at 123.888,48.318 h1 r90; Top Overlay "20" at 128.968,48.318 h1 r90; Top Overlay "19" at 128.968,40.698 h1 r90; Top Overlay "1" at 106.108,41.841 h1 r90; Top Overlay "2" at 106.108,48.318 h1 r90
HDR3: Top Overlay "3" at 145.048,41.547 h1 r90; Top Overlay "4" at 145.048,48.278 h1 r90; Top Overlay "7" at 150.128,41.547 h1 r90; Top Overlay "8" at 150.128,48.278 h1 r90; Top Overlay "9" at 152.668,41.547 h1 r90; Top Overlay "10" at 152.668,48.278 h1 r90; Top Overlay "13" at 157.748,40.658 h1 r90; Top Overlay "14" at 157.748,48.278 h1 r90; Top Overlay "17" at 162.828,40.658 h1 r90; Top Overlay "18" at 162.828,48.278 h1 r90; Top Overlay "5" at 147.588,41.547 h1 r90; Top Overlay "11" at 155.208,41.039 h1 r90; Top Overlay "15" at 160.288,40.658 h1 r90; Top Overlay "6" at 147.588,48.278 h1 r90; Top Overlay "12" at 155.208,48.278 h1 r90; Top Overlay "16" at 160.288,48.278 h1 r90; Top Overlay "2" at 142.508,48.278 h1 r90; Top Overlay "1" at 142.508,41.801 h1 r90; Top Overlay "19" at 165.368,40.658 h1 r90; Top Overlay "20" at 165.368,48.278 h1 r90
Logo5: Top Overlay "5V DC" at 172.2,40.1 h1.2
SN2: Top Overlay "REV 1.01" at 59.26,46.331 h1.3; Top Overlay "SL" at 54.18,46.331 h1.3
U3: Top Overlay "2" at 163.362,30.838 h0.8 r90; Top Overlay "3" at 163.4,33.4 h0.8 r90; Top Overlay "1" at 163.375,28.425 h0.8 r90
U4: Top Overlay "1" at 163.375,16.45 h0.8 r90; Top Overlay "2" at 163.375,19.175 h0.8 r90; Top Overlay "3" at 163.375,21.35 h0.8 r90